# EAGLE board omo_v2 (EAGLE 7.3.0)
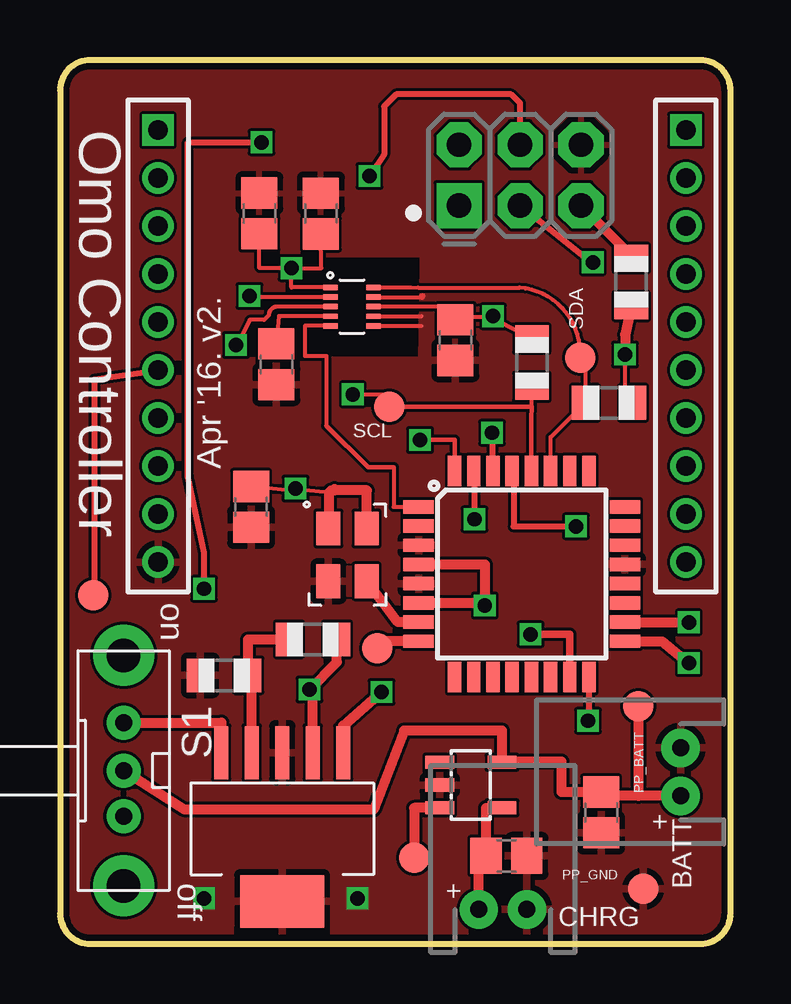
[diagram p0: board, top side]
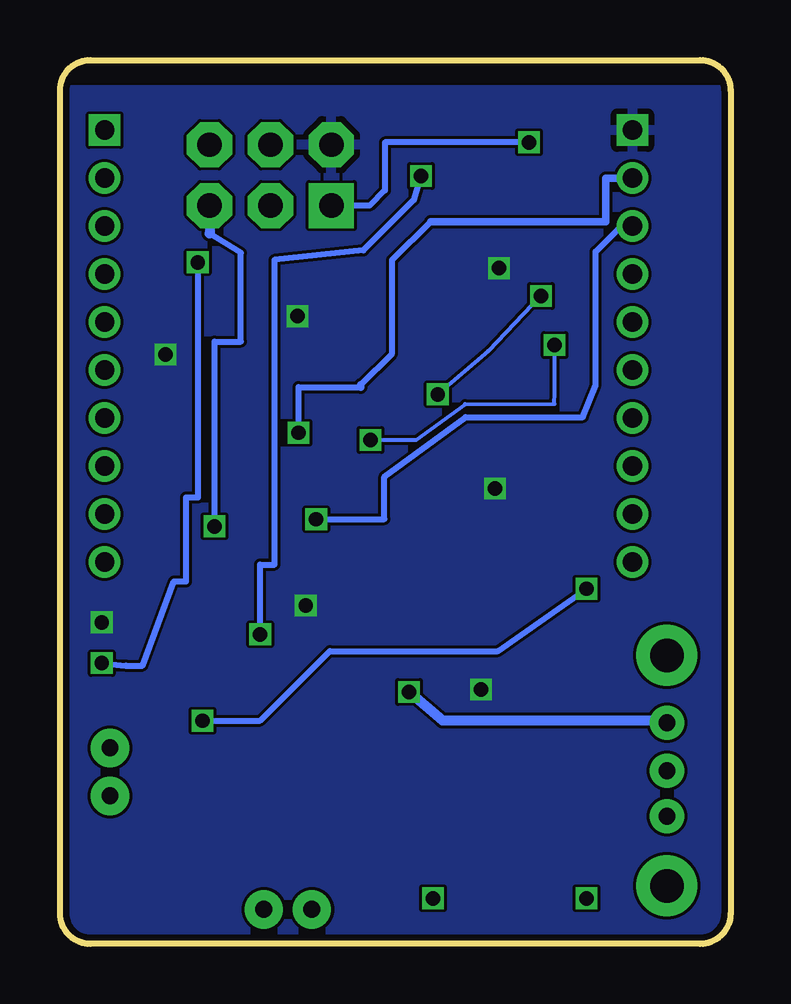
[diagram p1: board, bottom side, seen from below]

Size 27.94 x 36.83 mm. Coordinates in mm from the lower left corner, seen from the top.
Outline: 0,1.27 arc90 1.27,0 26.67,0 arc90 27.94,1.27 27.94,35.56 arc90 26.67,36.83 1.27,36.83 arc90 0,35.56 0,1.27
Copper layers (1*16): Top 0.035mm / dielectric 1.5mm / Bottom 0.035mm
Design rules "dirt_cheap_dirty_boards.v1": minimum track width 5mil, minimum drill 12mil, track to track 5mil, track to pad 5mil, pad to pad 5mil, via to via 5mil, smd to smd 0mil, copper to edge 10mil, drill to drill 10mil, minimum pad ring 10mil, minimum via ring 6mil, stop-mask expansion 2mil, vias tented up to drill 25mil, thermal gap 10mil

## Footprints (pad centres in the part's own frame; a part is rotated, then mirrored left to right if it is on the bottom)
C0805 = smd 1.3 x 1.5: 1 -0.85,0; 2 0.85,0
JST-2-PTH-NS = drill 0.7 pad 1.6: 1 -1,0; 2 1,0
SOT23-5L = smd 0.55 x 1.2: 1 -0.95,-1.3; 2 0,-1.3; 3 0.95,-1.3; 4 0.95,1.3; 5 -0.95,1.3
2X3-NS = drill 1.016 pad 1.88 square: 1 -2.54,-1.27 | drill 1.016 pad 1.88 octagon: 2 -2.54,1.27; 3 0,-1.27; 4 0,1.27; 5 2.54,-1.27; 6 2.54,1.27
B1,27 = smd 1.27 x 1.27: TP 0,0
R0805 = smd 1.1 x 1.4: 1 -1,0; 2 1,0
EG1213 = drill 0.7 pad 1.422: 1 -2,0; 2 0,0; 3 1.9,0 | drill 1.4 pad 2.54: MT1 -4.8,0; MT2 4.8,0
TQFP32-08 = smd 1.27 x 0.559: 1 -4.293,2.8; 2 -4.293,2; 3 -4.293,1.2; 4 -4.293,0.4; 5 -4.293,-0.4; 6 -4.293,-1.2; 7 -4.293,-2; 8 -4.293,-2.8; 17 4.293,-2.8; 18 4.293,-2; 19 4.293,-1.2; 20 4.293,-0.4; 21 4.293,0.4; 22 4.293,1.2; 23 4.293,2; 24 4.293,2.8 | smd 0.559 x 1.27: 9 -2.8,-4.293; 10 -2,-4.293; 11 -1.2,-4.293; 12 -0.4,-4.293; 13 0.4,-4.293; 14 1.2,-4.293; 15 2,-4.293; 16 2.8,-4.293; 25 2.8,4.293; 26 2,4.293; 27 1.2,4.293; 28 0.4,4.293; 29 -0.4,4.293; 30 -1.2,4.293; 31 -2,4.293; 32 -2.8,4.293
MMA8652FC = smd 0.6 x 0.225: 1 -0.9,0.8; 2 -0.9,0.4; 3 -0.9,0; 4 -0.9,-0.4; 5 -0.9,-0.8; 6 0.9,-0.8; 7 0.9,-0.4; 8 0.9,0; 9 0.9,0.4; 10 0.9,0.8
QX3-OSC-3.2X2.5 = smd 1.4 x 1: P1 -1,-0.7; P2 1.2,-0.7; P3 1.2,0.9; P4 -1,0.9
SOT-223-6 = smd 0.6 x 2.2: P1 -2.54,0; P2 -1.27,0; P3 0,0; P4 1.27,0; P5 2.54,0 | smd 3.5 x 2.2: P6 0,6.2
1X10-2MM = drill 0.8 square: 1 0,0 | drill 0.8: 2 2,0; 3 4,0; 4 6,0; 5 8,0; 6 10,0; 7 12,0; 8 14,0; 9 16,0; 10 18,0

## Placement (x,y rotation side)
A_FILT  0.1uF  [C0805]  10.87,30.43 90 top
A_FILT2  1uf  [C0805]  8.31,30.43 90 top
BATT  [JST-2-PTH-NS]  25.86,7.17 90 top
BYP  0.1uF  [C0805]  9.02,24.15 270 top
C-CHRG2  1uF  [C0805]  22.55,5.48 270 top
C-CRG  1uF  [C0805]  18.6,3.67 0 top
C-VREG  1uF  [C0805]  7.96,18.21 270 top
CHG  [JST-2-PTH-NS]  18.45,1.44 0 top
CHG_IC  MAX1555  [SOT23-5L]  17.12,6.62 270 top
ICSP  AVR_SPI_PRG_6NS  [2X3-NS]  19.17,32.03 0 top
PP_BATT  TPB1,27  [B1,27]  24.1,9.9 0 top
PP_CHG  TPB1,27  [B1,27]  14.76,3.59 0 top
PP_GND  TPB1,27  [B1,27]  24.3,2.3 0 top
PP_RSSI  TPB1,27  [B1,27]  1.38,14.53 0 top
PP_SCL  TPB1,27  [B1,27]  13.72,22.38 0 top
PP_SDA  TPB1,27  [B1,27]  21.67,24.42 0 top
PP_XOUT  TPB1,27  [B1,27]  13.21,12.32 0 top
R1  52.3k  [R0805]  10.54,12.69 0 top
R2  30.1k  [R0805]  6.84,11.19 0 top
R3  1k  [R0805]  19.66,24.22 90 top
R4  1k  [R0805]  22.88,22.55 0 top
R5  10k  [R0805]  23.8,27.58 270 top
S1  EG1213  [EG1213]  2.65,7.22 270 top
U1  ATMEGA328P_TQFP  [TQFP32-08]  19.24,15.41 0 top
U$1  MMA8652FCDFN  [MMA8652FC]  12.16,26.55 0 top
U$2  X  [QX3-OSC-3.2X2.5]  11.88,16.31 270 top
VDDIO  0.1uF  [C0805]  16.48,25.16 270 top
VREG  TPS73733DCQSMD  [SOT-223-6]  9.26,7.97 180 top
XB_LEFT  [1X10-2MM]  4.08,33.91 270 top
XB_RIGHT  [1X10-2MM]  26.08,33.91 270 top

## Library data of the parts
A_FILT A_FILT2 BYP C-CHRG2 C-CRG C-VREG R1-R5 S1 VDDIO = adafruit
BATT CHG ICSP XB_LEFT XB_RIGHT = SparkFun-Connectors
CHG_IC = maxim; MF: MAXIM; MPN: MAX1555EZK+T; OC_FARNELL: 1628222; OC_NEWARK: 59J2761
PP_BATT PP_CHG PP_GND PP_RSSI PP_SCL PP_SDA PP_XOUT = testpad
U1 = SparkFun-DigitalIC; PROD_ID: IC-09069
U$1 U$2 VREG = NicShackle

## Nets
+3V3: A_FILT2.1 A_FILT.1 C-VREG.1 ICSP.2 R1.2 R3.2 R4.2 R5.2 U1.4 U1.6 U1.18 U$1.1 U$1.8 U$2.P1 U$2.P4 VDDIO.1 VREG.P2 XB_LEFT.1
GND: A_FILT2.2 A_FILT.2 BATT.2 BYP.2 C-CHRG2.2 C-CRG.2 C-VREG.2 CHG.2 CHG_IC.2 ICSP.6 PP_GND.TP R2.1 U1.3 U1.5 U1.21 U$1.6 U$1.7 U$1.9 U$2.P2 VDDIO.2 VREG.P3 VREG.P6 XB_LEFT.10
INT1: U1.32 U$1.3
INT2: U1.1 U$1.5
MISO: ICSP.1 U1.16
MOSI: ICSP.4 U1.15
N$1: CHG_IC.3 PP_CHG.TP
N$2: PP_RSSI.TP XB_LEFT.6
N$3: R1.1 R2.2 VREG.P4
N$4: S1.1 VREG.P1 VREG.P5
N$6: PP_XOUT.TP U1.8
N$7: U1.7 U$2.P3
N$8: BYP.1 U$1.4
RST: ICSP.5 R5.1 U1.29
SCK: ICSP.3 U1.17
SCL: PP_SCL.TP R3.1 U1.28 U$1.2
SDA: PP_SDA.TP R4.1 U1.27 U$1.10
VBATT: BATT.1 C-CHRG2.1 CHG_IC.5 PP_BATT.TP S1.2
VUSB: C-CRG.1 CHG.1 CHG_IC.4
XBEE_DIN: U1.31 XB_LEFT.3
XBEE_DOUT: U1.30 XB_LEFT.2

## Tracks (layer width: path | path; a pad name or v marks a point on that pad's centre or on a via)
+3V3  (via drill 0.6)
  Top 0.17: 11.2,18.8 11.2,18.82 v9.81,18.97 9.41,18.9 C-VREG.1 | U$1.1 9.64,27.35 v9.64,28.16 | v9.64,28.16 8.31,28.16 A_FILT2.1 | v9.64,28.16 10.89,28.16 A_FILT.1 | R3.2 17.95,26.12 | 17.95,26.12 v18.05,26.16 | U$1.8 16.18,26.55 VDDIO.1 16.18,26.12 17.95,26.12 | R4.2 23.55,22.88 v23.55,24.55
  Top 0.305: 12.78,18.88 12.8,18.9 | 11.43,18.9 11.3,18.9
  Top 0.406: U1.18 v26.2,13.41 v26.2,13.4 | U1.6 17.59,14.21 v17.7,14.1 17.7,15.8 17.69,15.81 U1.4 | U$2.P4 12.78,18.88 | 12.8,18.9 11.43,18.9 11.43,18.95 | 11.3,18.9 11.2,18.8 11.2,17.33 U$2.P1 | VREG.P2 10.53,10.47 v10.4,10.6 11.54,11.74 R1.2 | R5.2 23.55,25.4 v23.55,24.55
  pour Bottom: 0,35.56 27.94,35.56 27.94,0 0,0
GND  (via drill 0.6)
  Top 0.17: U$1.6 15.06,25.75 | U$1.7 15.06,26.15 | U$1.9 15.05,26.95
  Top 0.254: 15.05,26.95 15.1,27
  other vias: 6,1.9 12.4,1.9
  pour Top: -0.1,24.28 28.29,24.38 28.29,-0.1 0,0
  pour Top: -0.1,24 -0.1,36.75 9.3,36.75 9.3,24.4 0.3,24.4 0.3,24.3
  pour Top: 8.8,36.75 8.6,28.7 28.3,28.7 28.35,36.8 16.62,36.75
  pour Top: 28.1,29.8 15.1,29.8 15,24.2 28.1,24.2
INT1  (via drill 0.6)
  Top 0.17: U$1.3 9.05,26.55 arc90 8.7,26.2 8.5,26 7.9,26 7.53,25.23 v7.33,24.96
  Top 0.18: U1.32 16.44,21 v15,21
  Bottom 0.17: v15,21 13.1,21 11.06,22.5 7.34,22.5 7.33,22.97 v7.33,24.96
INT2
  Top 0.17: 11.24,25.73 U$1.5 10.2,25.75 10.2,24.5 11.1,24.5 11.1,21.6 | 13.9,19.86 13.9,18.2 13.91,18.21 U1.1
  Top 0.18: 11.1,21.6 12.84,19.86 13.9,19.86
MISO  (via drill 0.6)
  Top 0.254: U1.16 22.04,9.3 v22,9.3 | v6,14.8 6,16.3 5.32,19.5 5.32,33.4 v8.4,33.4
  Bottom 0.254: v22,9.3 19.6,9.3 16.7,12.2 9.7,12.2 v6,14.8 | v8.4,33.4 14.4,33.4 14.4,31.4 15.04,30.76 ICSP.1
MOSI  (via drill 0.6)
  Top 0.254: ICSP.4 19.17,35.03 18.8,35.4 14,35.4 13.5,34.9 13.5,32.9 v12.9,32
  Top 0.305: U1.15 21.24,12.9 v19.6,12.9
  Bottom 0.254: v19.6,12.9 19.6,15.8 19,15.8 19,28.5 15.3,28.9 13.2,31 v12.9,32
N$1
  Top 0.406: CHG_IC.3 14.76,5.67 PP_CHG.TP
N$2
  Top 0.254: PP_RSSI.TP 1.44,14.59 1.44,23.51 1.44,23.52 XB_LEFT.6
N$3
  Top 0.406: R1.1 7.84,12.69 R2.2 7.99,11.19 VREG.P4
N$4  (via drill 0.6)
  Top 0.406: v13.4,10.5 11.8,9.1 VREG.P1 | S1.1 6.72,9.22 VREG.P5
  Bottom 0.406: S1.1 2.65,9.3 12,9.3 v13.4,10.5
N$6
  Top 0.406: U1.8 13.09,12.61 PP_XOUT.TP
N$7
  Top 0.406: U1.7 14.08,13.41 U$2.P3
N$8
  Top 0.17: U$1.4 9.12,26.15 BYP.1
RST  (via drill 0.6)
  Top 0.254: U1.29 18.9,19.64 18.9,17.4 v21.5,17.4
  Top 0.406: R5.1 23.7,28.77 ICSP.5
  Bottom 0.254: v21.5,17.4 21.5,25.1 20.4,25.1 20.4,28.79 21.71,29.6
  Bottom 0.406: ICSP.5 21.71,29.6
SCK  (via drill 0.6)
  Top 0.254: v22.2,28.4 21.86,28.61 ICSP.3
  Top 0.406: U1.17 25.09,12.61 v26.2,11.7
  Bottom 0.254: v26.2,11.7 25.2,11.6 24.5,11.6 23.2,15.1 22.7,15.1 22.7,18.6 22.2,18.6 v22.2,28.4
SCL  (via drill 0.6)
  Top 0.17: U$1.2 7.9,26.95 v7.9,27 | v12.2,22.9 13.82,22.9 PP_SCL.TP | 19.66,22.38 19.66,22.86 R3.1
  Top 0.18: U1.28 19.64,21.88 19.66,22.38 PP_SCL.TP
  Bottom 0.17: v7.9,27 10.1,24.7 v12.2,22.9
SDA
  Top 0.17: U$1.10 14.61,27.35 14.93,27.34 19.15,27.34 arc-90 PP_SDA.TP 21.88,24.21 R4.1 20.44,21.11 U1.27
  Top 0.254: U1.27
VBATT
  Top 0.305: 22.55,6.17 C-CHRG2.1
  Top 0.406: S1.2 5.2,5.6 13.07,5.6 14.34,8.89 18.42,8.89 CHG_IC.5 18.42,7.6 20.9,7.6 20.9,6.33 C-CHRG2.1 | BATT.1 24.1,6.17 | 24.1,6.17 22.55,6.17 | PP_BATT.TP 24.1,6.17
VUSB
  Top 0.406: CHG.1 17.45,3.37 arc-90 C-CRG.1 17.75,5.67 CHG_IC.4
XBEE_DIN  (via drill 0.6)
  Top 0.254: U1.31 17.27,19.7 v17.27,17.7
  Bottom 0.254: v17.27,17.7 14.42,17.7 14.42,19.47 11.04,21.95 6.15,21.95 5.62,23.29 5.62,28.84 4.55,29.91 XB_LEFT.3
XBEE_DOUT  (via drill 0.6)
  Top 0.254: U1.30 18.04,21.3 v18,21.3
  Bottom 0.254: v18,21.3 18,23.2 15.4,23.2 | 15.4,23.3 14.1,24.6 14.1,28.5 12.5,30.1
  Bottom 0.305: 15.4,23.2 15.4,23.3 | 12.5,30.1 5.2,30.1 5.2,31.91 XB_LEFT.2

## Text on the board
tPlace: Omo Controller | Apr '16. v2. | on | off
tNames: SDA | SCL | + | + | BATT | CHRG